# Altium PCB DAQ_Doc.PcbDoc (part 1 of 2)
Units mm, origin at the board's own origin, x right, y up, seen from the top; angles counter-clockwise.
Board outline 100.4 x 106.42 mm, 4 copper layers (Top Layer, Int1 (GND), Int2 (GND), Bottom Layer), stack 1.57 mm thick; 103 components, 79 nets, 453 pads, 246 vias.
Unrouted connection lines stored in the file: 5.
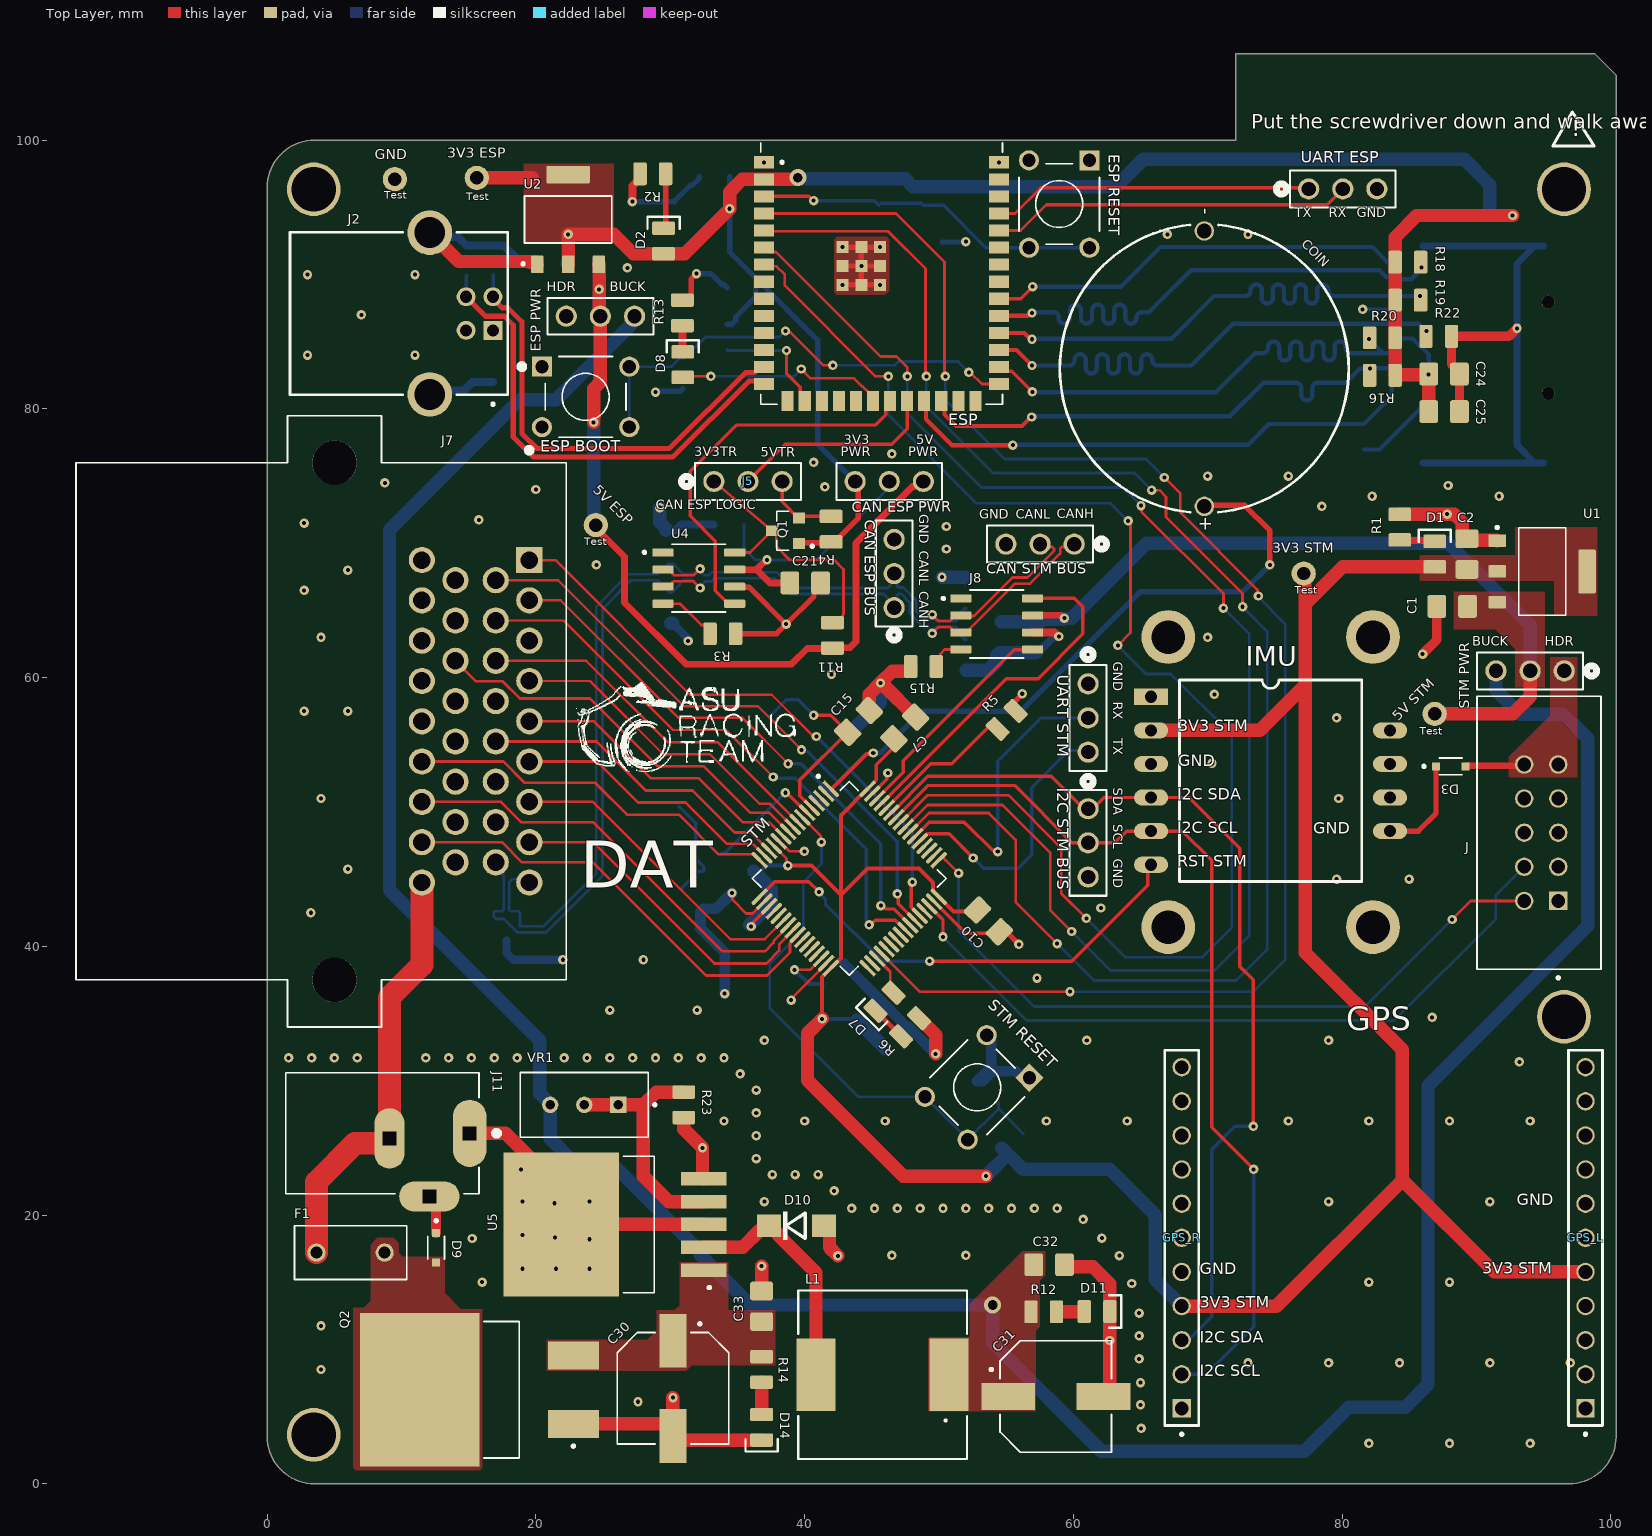
[diagram p0: Top Layer view]
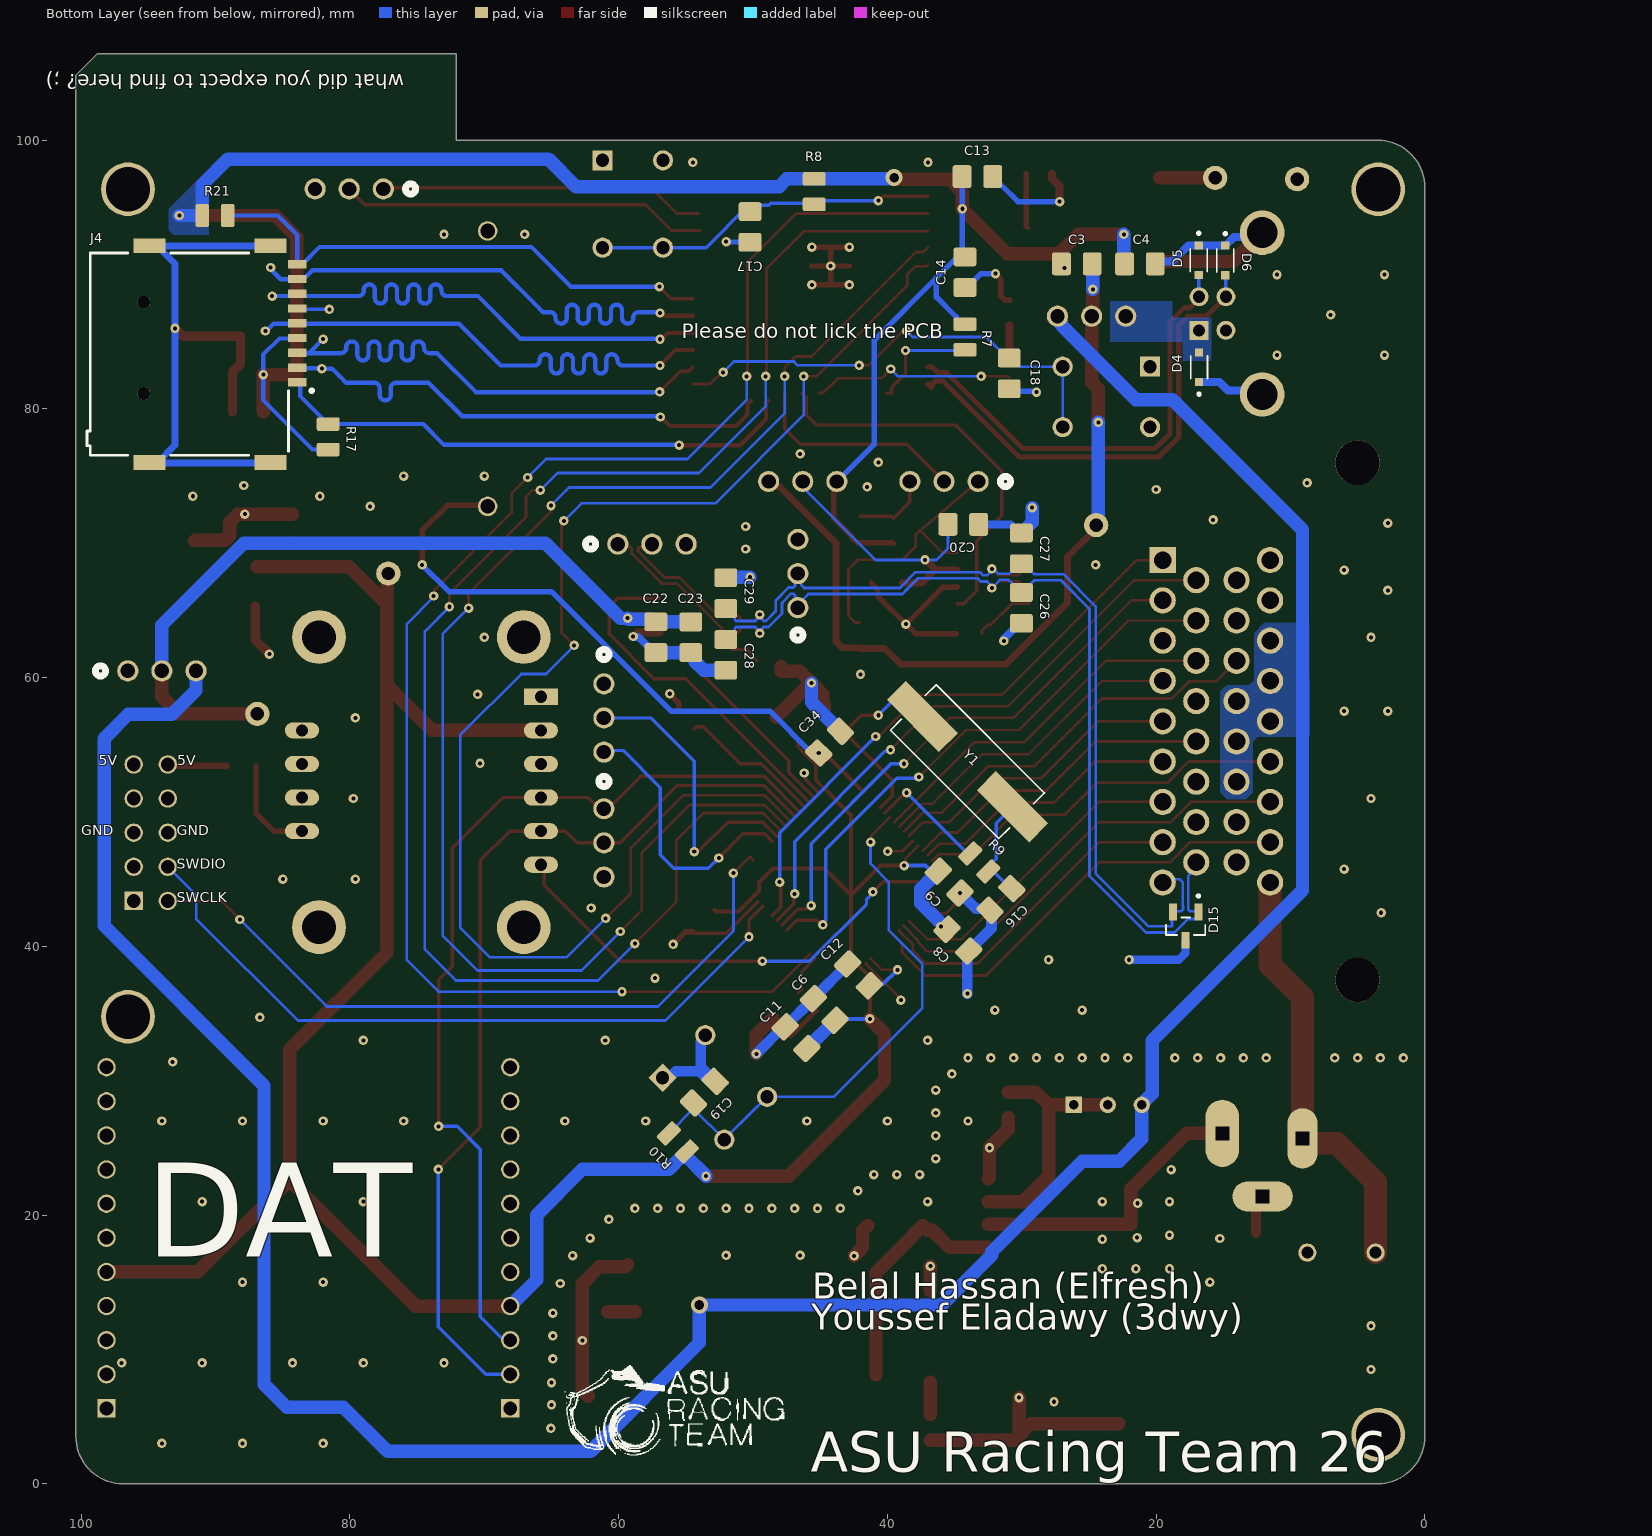
[diagram p1: Bottom Layer view, seen from below]
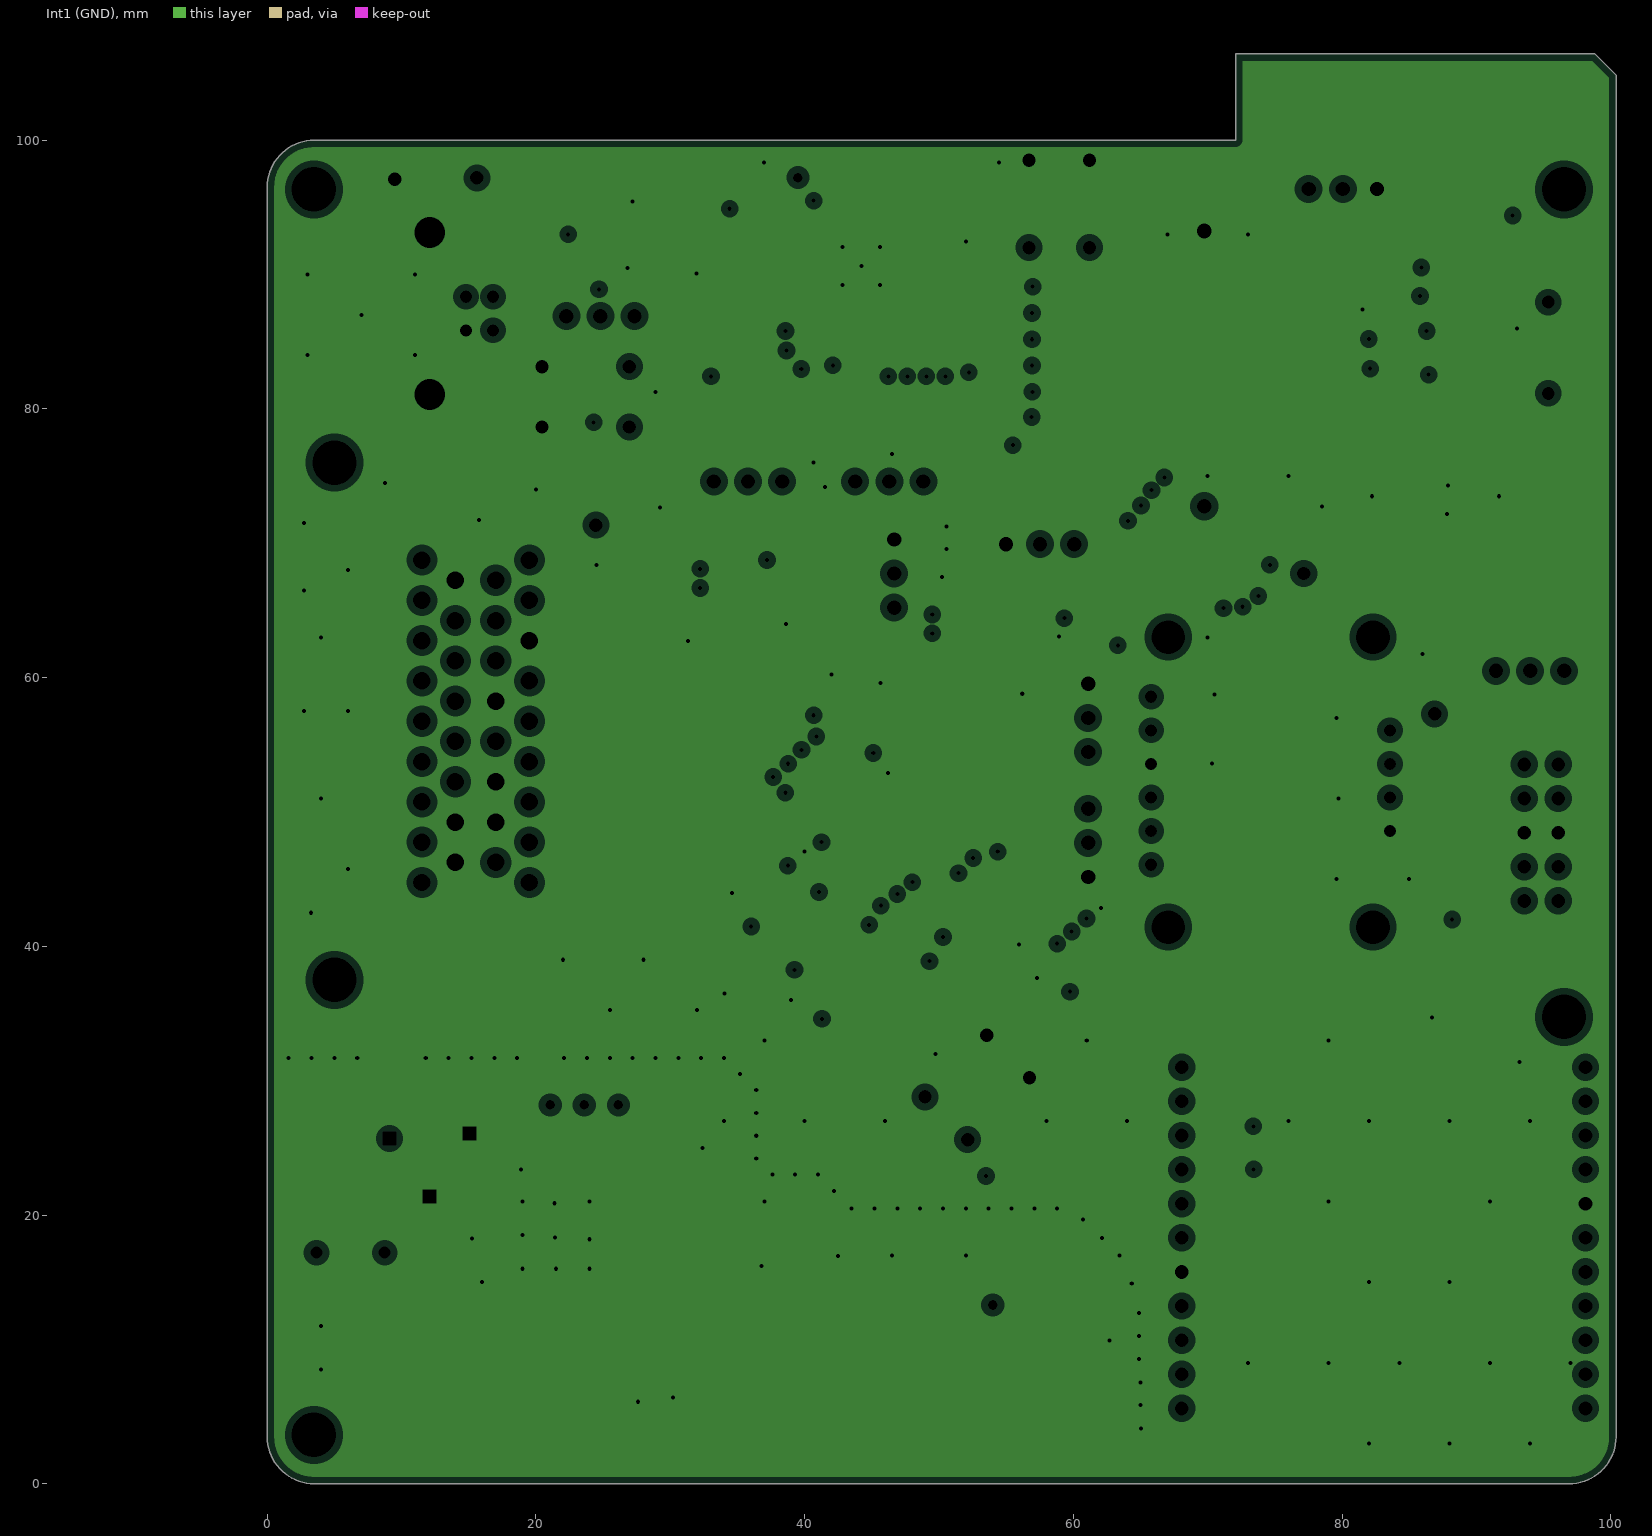
[diagram p2: Int1 (GND), clearances drawn from the general rule]
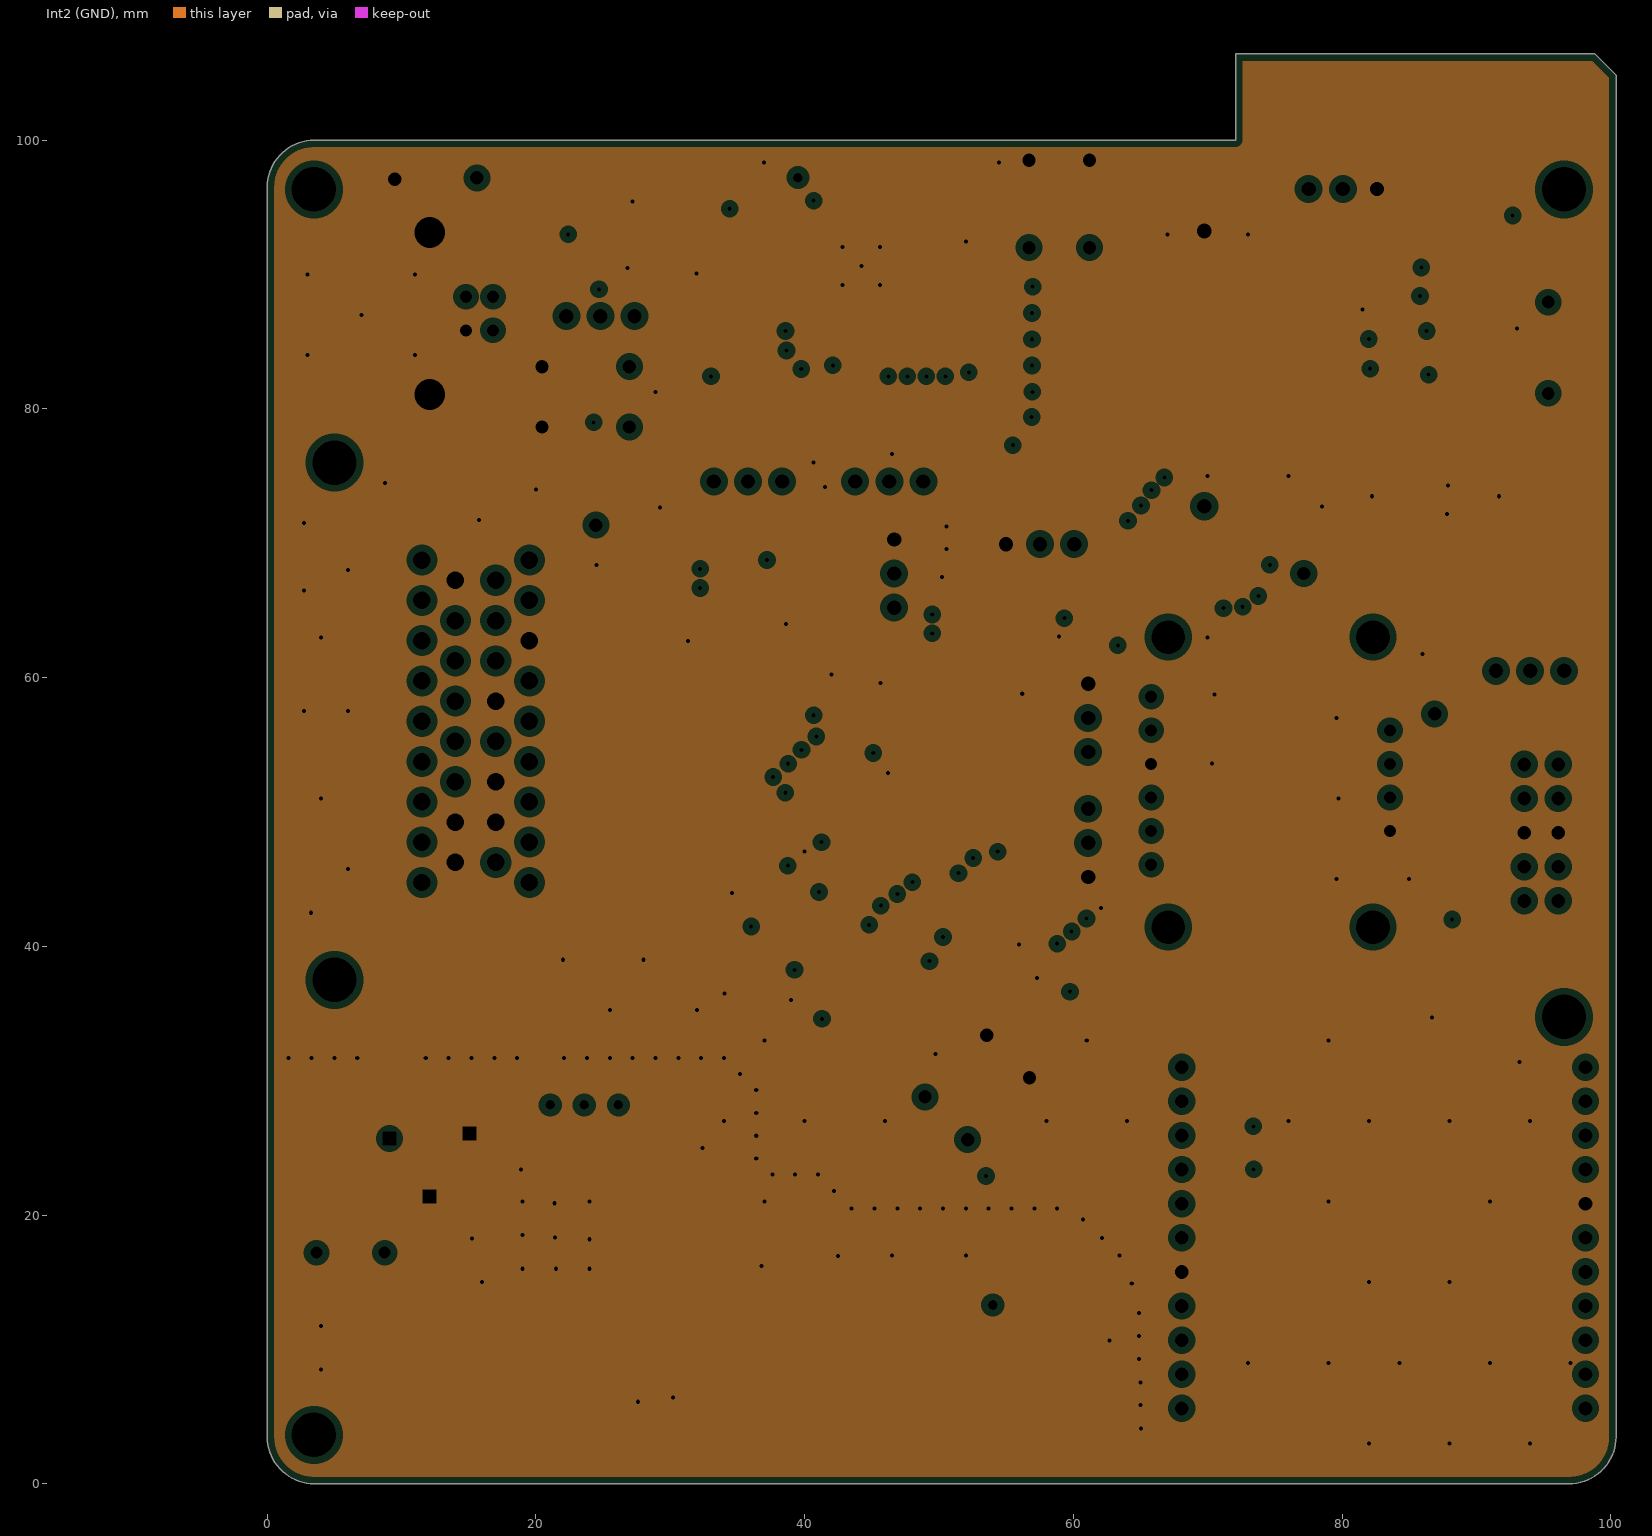
[diagram p3: Int2 (GND), clearances drawn from the general rule]
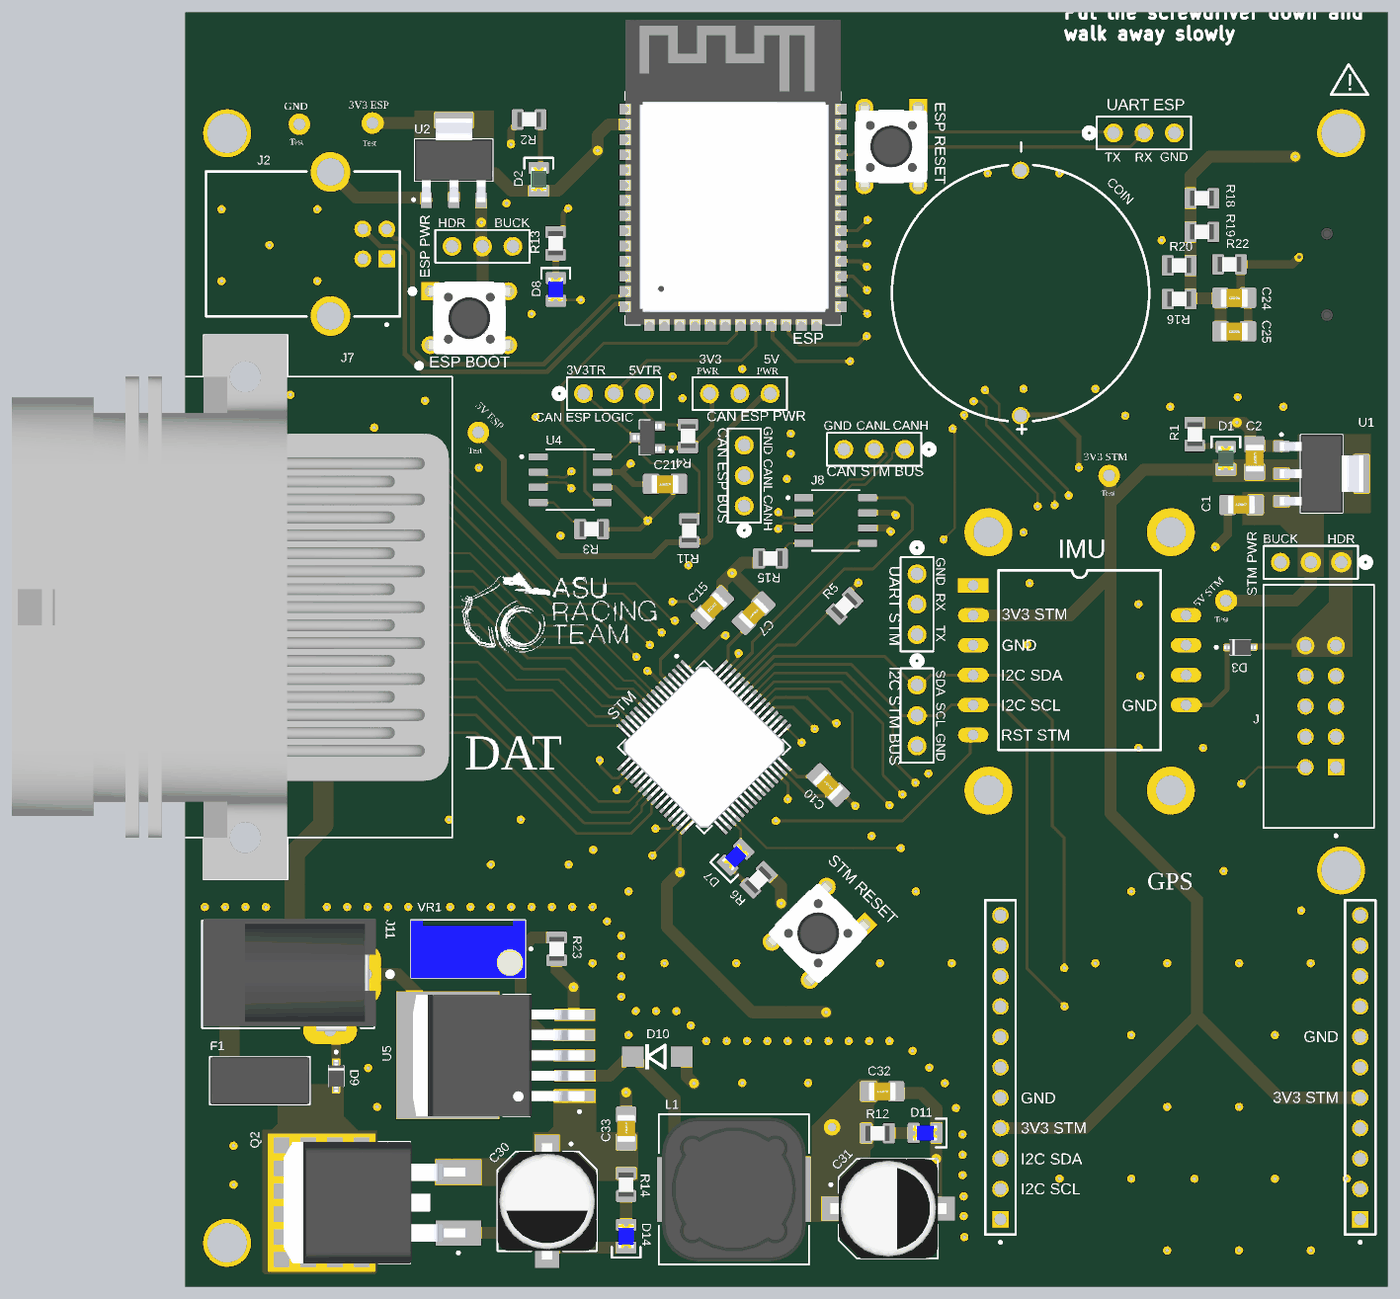
[diagram p5: 3D render of the assembled board from above, using the file's embedded part models]
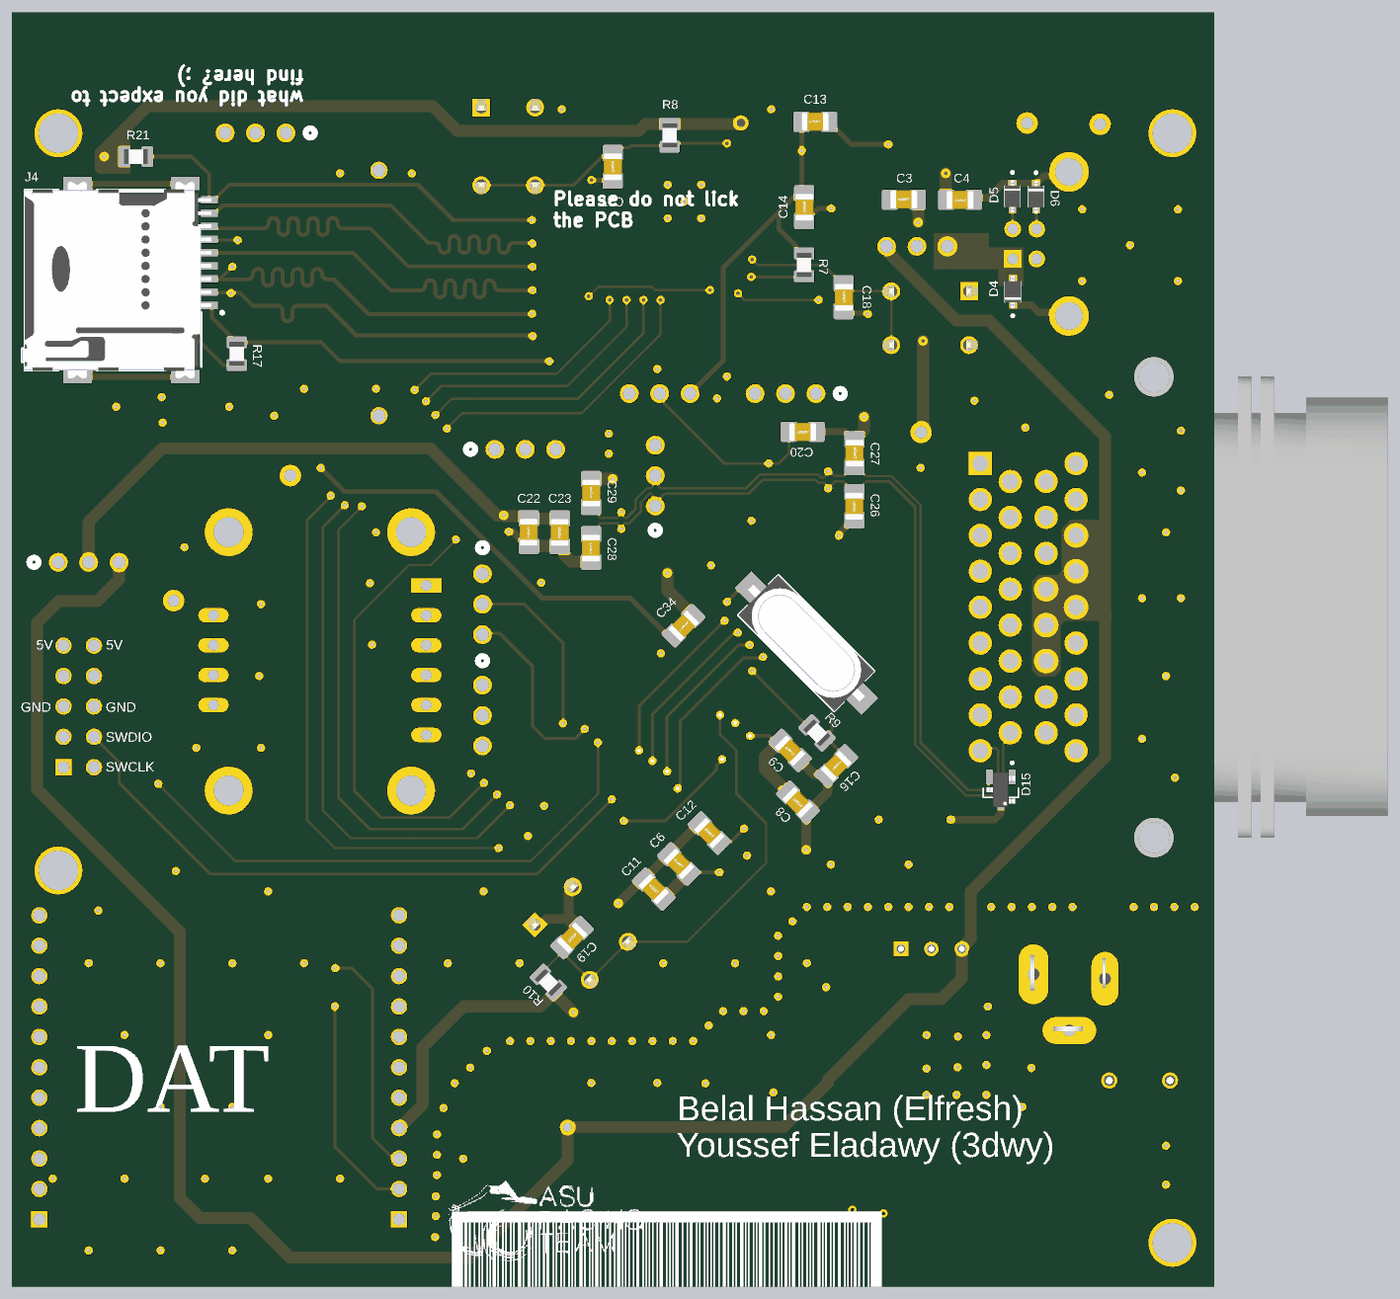
[diagram p6: 3D render of the assembled board from below, using the file's embedded part models]

## Layer stack, top to bottom
Top Solder: solder mask 0.0254, SM-001, Dk 4
Top Layer: signal copper 0.035
Dielectric 2: prepreg 0.2, PP-017, Dk 4.6
Int1 (GND): plane copper 0.0175, net GND
Dielectric 3: core 1.065, Core-039, Dk 4.8
Int2 (GND): plane copper 0.0175, net GND
Dielectric 4: prepreg 0.2, PP-017, Dk 4.6
Bottom Layer: signal copper 0.035
Bottom Solder: solder mask 0.0254, SM-001, Dk 4

## Board outline
0,3.5 0,96.5 cw(c3.5,96.5) 3.5,100 72.075,100 72.075,106.425 98.825,106.425 100.4,104.85 100.4,96.5 100.4,3.5 cw(c96.9,3.5) 96.9,0 3.5,0 cw(c3.5,3.5)

## Design rules (kind name [scope] priority, off if disabled: settings)
BoardOutlineClearance [All] p1: gap=0.3 ignorepadtopadclearanceinfootprint=FALSE except(0.4: Arc-SplitBarrior Arc-SplitContinuation Track-SplitBarrior Track-SplitContinuation SMDPad-SplitBarrior SMDPad-SplitContinuation THPad-SplitBarrior THPad-SplitContinuation Via-SplitBarrior Via-SplitContinuation Fill-SplitBarrior Fill-SplitContinuation Poly-SplitBarrior Poly-SplitContinuation Region-SplitBarrior Region-SplitContinuation Text-SplitBarrior Text-SplitContinuation)
Clearance "Clearance Same Nets" [All] p1: gap=0 ignorepadtopadclearanceinfootprint=FALSE
Clearance [All] p2: gap=0.152 ignorepadtopadclearanceinfootprint=TRUE
ComponentClearance [All] p1: gap=0 collisioncheckmode=3 verticalgap=0 showdistances=FALSE
DiffPairsRouting DiffPairsRouting_1 [All] p1: maxlimit=0.254 minlimit=0.254 mostfreqgap=0.254 toplayer_minwidth=0.381 toplayer_maxwidth=0.381 toplayer_prefwidth=0.381 bottomlayer_minwidth=0.381 bottomlayer_maxwidth=0.381 bottomlayer_prefwidth=0.381 maxuncoupledlength=12.7
DiffPairsRouting ESP_USB_Impedance [InDifferentialPair('ESP_USB_D')] p2: maxlimit=0.3 minlimit=0.3 mostfreqgap=0.3 toplayer_minwidth=0.3 toplayer_maxwidth=0.3 toplayer_prefwidth=0.3 bottomlayer_minwidth=0.3 bottomlayer_maxwidth=0.3 bottomlayer_prefwidth=0.3 impedanceprofiledriven=TRUE impedanceprofileid={AE35CDEA-F245-4979-9637-B15F08414B0D} impedanceprofilevalue=90.000000 maxuncoupledlength=12.7
Height [All] p1: minheight=0 maxheight=100 prefheight=12.7
HoleSize [All] p1: absolutevalues=TRUE maxlimit=6.3 minlimit=0.2 maxpercent=80.000 minpercent=20.000
MatchedLengths MatchLengths_xS_SDIO [InxSignalClass('xS_SDIO_Class')] p1: tolerance=1.2 checknetsindiffpair=FALSE checkdiffpairvsdiffpair=TRUE checkxsignals=TRUE checkothers=TRUE
MinimumAnnularRing [All] p1: minimumring=0.13
MinimumSolderMaskSliver [All] p1: minsoldermaskwidth=0.1
PlaneClearance [All] p1: clearance=0.508
PlaneConnect [All] p1: planeconnectstyle=Direct reliefexpansion=0.508 reliefentries=4 reliefconductorwidth=0.254 reliefairgap=0.254
PolygonConnect PolygonConnect_1 [All] p1: connectstyle=Direct reliefconductorwidth=0.508 reliefentries=4 polygonreliefangle="90 Angle" airgapwidth=0.254
PolygonConnect [All] p2: connectstyle=Direct reliefconductorwidth=0.254 reliefentries=4 polygonreliefangle="90 Angle" airgapwidth=0.254
RoutingVias [All] p1: holewidth=0.5 width=1 viastyle="Through Hole" minholewidth=0.2 minwidth=0.35 maxholewidth=1 maxwidth=2
SilkToSilkClearance [All] p1: silktosilkclearance=0.1
SilkToSolderMaskClearance [IsPad] p1: minsilkscreentomaskgap=0.1 clearancetoexposedcopper=TRUE
SolderMaskExpansion [All] p1: expansion=0.05 istentingtop=FALSE
SupplyNets "Schematic Supply Nets_13" [InNet('CAN_ESP_Vin')] p1: voltage=0.000
SupplyNets "Schematic Supply Nets_12" [InNet('GND')] p2: voltage=0.000
SupplyNets "Schematic Supply Nets_11" [InNet('DC_Fuse_+12V')] p3: voltage=0.000
SupplyNets "Schematic Supply Nets_10" [InNet('+5V_Induc')] p4: voltage=0.000
SupplyNets "Schematic Supply Nets_9" [InNet('+5V_STMF4')] p5: voltage=0.000
SupplyNets "Schematic Supply Nets_8" [InNet('+5V_STMF4_HDR')] p6: voltage=0.000
SupplyNets "Schematic Supply Nets_6" [InNet('DC_IN_+12V')] p7: voltage=0.000
SupplyNets "Schematic Supply Nets_5" [InNet('+5V_ESP')] p8: voltage=0.000
SupplyNets "Schematic Supply Nets_4" [InNet('+5V_ESP_HDR')] p9: voltage=0.000
SupplyNets "Schematic Supply Nets_3" [InNet('+3V3_ESP')] p10: voltage=0.000
SupplyNets "Schematic Supply Nets_2" [InNet('+5V_Buck')] p11: voltage=0.000
SupplyNets "Schematic Supply Nets_1" [InNet('+3V3_STM32F4')] p12: voltage=0.000
SupplyNets "Schematic Supply Nets" [InNet('+12V')] p13: voltage=0.000
Width Width_1 [All] p1: maxlimit=100 minlimit=0.1 preferedwidth=0.2 minimp=50.000000 maximp=50.000000 favimp=50.000000
Width STMF4_SWD [InNetClass('JTAG')] p2: maxlimit=0.318 minlimit=0.318 preferedwidth=0.318 impedanceprofiledriven=TRUE impedanceprofileid={C978D3B7-4BA8-4DEE-A065-BD367ADA8D77} impedanceprofilevalue=50.000000 minimp=50.000000 maximp=50.000000 favimp=50.000000
Width SD-CARD_SDIO_Width [InNetClass('SDIO')] p3: maxlimit=0.318 minlimit=0.318 preferedwidth=0.318 impedanceprofiledriven=TRUE impedanceprofileid={C978D3B7-4BA8-4DEE-A065-BD367ADA8D77} impedanceprofilevalue=50.000000 minimp=50.000000 maximp=50.000000 favimp=50.000000
21 further rules are at their usual default settings.

## Classes and differential pairs
net class ESP_USB_Diff_Pair: ESP_USB_D_N ESP_USB_D_P
differential pair ESP_USB_D: +ESP_USB_D_P -ESP_USB_D_N
differential pair CAN: +CAN_P -CAN_N

## Components (designator, comment, footprint, x,y, rotation, side; value= is the part's Value field where it differs from the comment)
C1 "22uF" CAP_0805 88.2,65.3 r0 top
C2 "22uF" CAP_0805 89.3,69.2 r270 top
C3 "22uF" CAP_0805 25.9,90.8 r180 bottom
C4 "22uF" CAP_0805 21.2,90.8 r0 bottom
C6 "100nF" CAP_0805 44.7,35.3 r225 bottom
C7 "100nF" CAP_0805 47.452,56.252 r225 top
C8 "100nF" CAP_0805 34.75,40.46 r45 bottom
C9 "100nF" CAP_0805 35.4,44.78 r45 bottom
C10 "100nF" CAP_0805 53.683,41.892 r135 top
C11 "2.2uF" CAP_0805 46.8,33.2 r225 bottom
C12 "2.2uF" CAP_0805 42.15,37.875 r225 bottom
C13 "2.2uF" CAP_0805 33.3,97.3 r180 bottom
C14 "100nF" CAP_0805 34.225,90.175 r270 bottom
C15 "100nF" CAP_0805 44.01,56.74 r45 top
C16 "100nF" CAP_0805 31.55,43.49 r315 bottom
C17 "100nF" CAP_0805 50.225,93.55 r270 bottom
C18 "100nF" CAP_0805 30.925,82.643 r270 bottom
C19 "100nF" CAP_0805 53.623,29.147 r315 bottom
C20 "100nF" CAP_0805 34.35,71.41 r0 bottom
C21 "2.2uF" CAP_0805 40.043,67.05 r180 top
C22 "100nF" CAP_0805 57.225,63.013 r90 bottom
C23 "2.2uF" CAP_0805 54.635,63.003 r90 bottom
C24 "100nF" CAP_0805 87.6,82.6 r180 top
C25 "2.2uF" CAP_0805 87.6,79.8 r180 top
C26 "20pF" CAP_0805 30.025,65.187 r90 bottom
C27 "20pF" CAP_0805 30.025,69.623 r270 bottom
C28 "20pF" CAP_0805 52.025,61.693 r90 bottom
C29 "20pF" CAP_0805 52.025,66.293 r270 bottom
C30 "270uF 35V" CAP_EEEFT1E471AP 30.2,7.1 r270 top
C31 "470uF 25V" CAP_EEEFT1E471AP 58.7,6.5 r0 top
C32 "100nF" CAP_0805 58.2,16.3 r180 top
C33 "100nF" CAP_0805 36.8,13.2 r270 top
C34 "100nF" CAP_0805 44.3,55.2 r315 bottom
"CAN ESP BUS" "CAN(ESP)_Header" CONN_SD-42375-001_M320_03_MOL 46.665,65.205 r270 top
"CAN ESP PWR" "22284034" CONN_SD-42375-001_M320_03_MOL 48.84,74.6 r0 top
"CAN STM BUS" "CAN(STMF4)_Header" CONN_SD-42375-001_M320_03_MOL 60.065,69.94 r0 top
COIN "CR-2032" PANA-CR-2032HFN 69.75,83 r90 top
D1 "GREEN" LED_0805_GREEN 86.9,69.2 r270 top
D2 "GREEN" LED_0805_GREEN 29.5,92.5 r270 top
D3 "5V-TVS" DIO_PESD1LIN 88.1,53.4 r0 top
D4 "5V-TVS" DIO_PESD1LIN 16.8,83.1 r90 bottom
D5 "5V-TVS" DIO_PESD1LIN 16.825,91.075 r270 bottom
D6 "5V-TVS" DIO_PESD1LIN 14.85,91.05 r270 bottom
D7 "BLUE" LED_0805_BLUE 45.95,35.875 r45 top
D8 "BLUE" LED_0805_BLUE 30.925,83.3 r270 top
D9 "5V-TVS" DIO_PESD1LIN 12.575,17.575 r270 top
D10 "SS34-A" DO-214AC 39.4,19.2 r0 top
D11 "BLUE" LED_0805_BLUE 61.77,12.82 r180 top
D14 "BLUE" LED_0805_BLUE 36.8,4.2 r90 top
D15 "ESD2CAN24DBZRQ1" SOT95P237X112-3N 17.8,41.5 r270 bottom
ESP "ESP32-S3-WROOM-1-N8R2" ESP32-S3-WROOM-1_NO-KEEPOUT 45.725,93.1 r0 top
"ESP BOOT" "BOOT_ESP" SW_FSM8JH 23.7,80.9 r0 top
"ESP PWR" "22284034" CONN_SD-42375-001_M320_03_MOL 22.26,86.9 r180 top
"ESP RESET" "Reset_ESP" SW_FSM8JH 58.95,95.25 r270 top
F1 "0697H0315-01" FUSRR508W60L835T400H810 6.2,17.2 r0 top
GPS_L "Header 11-pin" SAMTEC_MTSW-111-22-T-S-440 98.123,18.304 r270 top
GPS_R "Header 11-pin" SAMTEC_MTSW-111-22-T-S-440 68.068,18.304 r270 top
"I2C STM BUS" "I2C_Header" CONN_SD-42375-001_M320_03_MOL 61.1,50.24 r90 top
IMU "BNO055" IMU 65.795,58.575 r0 top
J "1761681-3" TE_1761681-3 96.1,43.38 r90 top
J2 "USB-B-S-X-X-TH" SAMTEC_USB-B-S-X-X-TH 12.1,87.1 r270 top
J4 "SD-Card" GCT_MEM2075-00-140-01-A 95.345,84.555 r270 bottom
J5 "22284034" CONN_SD-42375-001_M320_03_MOL 33.245,74.6 r180 top
J7 "6437288-1" TE_6437288-1 15.51,56.751 r270 top
J8 "MCP2551-I/SN" SOIC127P599X175-8N 54.3,63.993 r180 top
J11 "PJ-002B" CUI_PJ-002B 15.069,26.081 r180 top
L1 "47uF" IND_CDRH127/LDNP-470MC_SUM 45.8,8.1 r180 top
Q1 "2N7002" TRANS_2N7002 38.57,70.93 r180 top
Q2 "IRF4905STRRPBF" TRANS_IRF4905STRRPBF 15.8,7 r180 top
R1 "1k" RES_0805 84.3,71.2 r270 top
R2 "1k" RES_0805 28.7,97.5 r180 top
R3 "10k" RES_0805 33.91,63.27 r0 top
R4 "10k" RES_0805 41.97,71.05 r270 top
R5 "0R" RES_0805 55.041,56.851 r225 top
R6 "1k" RES_0805 47.85,33.975 r225 top
R7 "10k" RES_0805 34.225,85.35 r270 bottom
R8 "10k" RES_0805 45.45,96.175 r90 bottom
R9 "1k" RES_0805 33.16,46.25 r225 bottom
R10 "10k" RES_0805 55.6,25.4 r225 bottom
R11 "10k" RES_0805 42.075,63.15 r270 top
R12 "1.5k" RES_0805 57.8,12.8 r180 top
R13 "1k" RES_0805 30.9,87.15 r90 top
R14 "5k" RES_0805 36.8,8.5 r90 top
R15 "10k" RES_0805 48.85,60.825 r180 top
R16 "10k" RES_0805 83,82.5 r0 top
R17 "10k" RES_0805 81.625,77.925 r270 bottom
R18 "10k" RES_0805 84.9,90.925 r180 top
R19 "10k" RES_0805 84.9,88.1 r180 top
R20 "10k" RES_0805 83,85.3 r0 top
R21 "10k" RES_0805 90.05,94.4 r0 bottom
R22 "10k" RES_0805 87.2,85.4 r180 top
R23 "330R" RES_0805 31,28.2 r90 top
STM "STM32F446RET6" QFP50P1200X1200X160-64N 43.32,45.051 r315 top
"STM PWR" "22284034" CONN_SD-42375-001_M320_03_MOL 96.54,60.5 r0 top
"STM RESET" "Reset_STM32" SW_FSM8JH 52.846,29.501 r225 top
U1 "AMS1117-3.3" SOT229P700X180-4N 94.9,67.9 r0 top
U2 "AMS1117-3.3" SOT229P700X180-4N 22.4,94.1 r90 top
U4 "SN65HVD230D" SOIC127P599X175-8N 32.125,67.405 r180 top
U5 "LM2596SX-ADJ/NOPB" VREG_LM2596SX-ADJ/NOPB 21.9,19.3 r180 top
"UART ESP" "UART(ESP)_Header" CONN_SD-42375-001_M320_03_MOL 77.52,96.375 r180 top
"UART STM" "UART(STMF4)_Header" CONN_SD-42375-001_M320_03_MOL 61.1,54.46 r270 top
VR1 "0 - 10K" TRIM_3296W-1-103LF 23.6,28.2 r180 top
Y1 "8MHz" XTAL_ECS-80-20-5PVX 34.039,53.749 r45 bottom

## Footprints (in the part's own frame and the unit in brackets; to place one, negate y for a bottom-side part, rotate by r counter-clockwise, add the part's x,y. Pads: shape width x height; smd on the part's side, far side on the other; paste and mask are expansions set on the pad)
CAP_0805 [mm]
  rrect25% 1.4x1.7 smd: 1(-1.143,0) 2(1.143,0)
  body extent -1.15,-0.76 1.15,0.79, height 1.01
CAP_EEEFT1E471AP [mm]
  rect 4x2 smd: 1(-3.55,0) 2(3.55,0)
  silkscreen extent -4.9,-4.15 4.15,4.15, body extent -4.85,-4.15 4.85,4.15, height 10.2
CONN_SD-42375-001_M320_03_MOL [mil]
  round 62 hole 42: 1(0,0) 2(-100,0) 3(-200,0)
  silkscreen extent -255,-54 95,54
CUI_PJ-002B [mm]
  oval 2.5x5 hole 1 square: 1(0,0)
  oval 2.25x4.5 hole 1 square: 2(5.969,0.381)
  oval 4.5x2.25 hole 1 square: 3(3,4.7)
  silkscreen extent -2.2,-4.5 13.7,4.5, body extent -0.81,-4.63 13.59,4.77, height 11
DIO_PESD1LIN [mm]
  rect 0.6x0.6 smd paste-0.05: 1(-1.1,0) 2(1.1,0)
  silkscreen extent -2.1,-0.63 0.85,0.63, body extent -1.34,-0.65 1.34,0.65, height 1.15
DO-214AC [mm]
  rect 1.8x1.7 smd: A(2.05,0) C(-2.05,0)
  silkscreen extent -1,-1.05 0.65,1.05
ESP32-S3-WROOM-1_NO-KEEPOUT [mm]
  rect 1.5x0.9 smd: 1(-8.75,5.26) 2(-8.75,3.99) 3(-8.75,2.72) 4(-8.75,1.45) 5(-8.75,0.18) 6(-8.75,-1.09) 7(-8.75,-2.36) 8(-8.75,-3.63) 9(-8.75,-4.9) 10(-8.75,-6.17) 11(-8.75,-7.44) 12(-8.75,-8.71) 13(-8.75,-9.98) 14(-8.75,-11.25) 27(8.75,-11.25) 28(8.75,-9.98) 29(8.75,-8.71) 30(8.75,-7.44) 31(8.75,-6.17) 32(8.75,-4.9) 33(8.75,-3.63) 34(8.75,-2.36) 35(8.75,-1.09) 36(8.75,0.18) 37(8.75,1.45) 38(8.75,2.72) 39(8.75,3.99) 40(8.75,5.26)
  rect 0.9x1.5 smd: 15(-6.985,-12.5) 16(-5.715,-12.5) 17(-4.445,-12.5) 18(-3.175,-12.5) 19(-1.905,-12.5) 20(-0.635,-12.5) 21(0.635,-12.5) 22(1.905,-12.5) 23(3.175,-12.5) 24(4.445,-12.5) 25(5.715,-12.5) 26(6.985,-12.5)
  rect 0.9x0.9 smd: 41_1(-1.5,-2.46) 41_2(-2.9,-2.46) 41_3(-0.1,-2.46) 41_4(-2.9,-3.86) 41_5(-1.5,-3.86) 41_6(-0.1,-3.86) 41_7(-2.9,-1.06) 41_8(-1.5,-1.06) 41_9(-0.1,-1.06)
  silkscreen extent -9,-12.75 9,6.7, body extent -9,-12.75 9,12.75, height 3.25
FUSRR508W60L835T400H810 [mm]
  round 1.35 hole 0.9: 1(-2.54,0) 2(2.54,0)
  silkscreen extent -4.18,-2 4.18,2, body extent -4.18,-2 4.18,2, height 8.1
GCT_MEM2075-00-140-01-A [mm]
  rect 0.62x1.4 smd: P1(2.58,11.42) P2(1.48,11.42) P3(0.38,11.42) P4(-0.72,11.42) P5(-1.82,11.42) P6(-2.92,11.42) P7(-4.02,11.42) P8(-5.12,11.42) P9(-6.22,11.42)
  rect 1.1x2.4 smd: SH1(-7.6,0.42) SH2(-7.6,9.42) SH3(8.55,9.42) SH4(8.55,0.42)
  round 0.95 hole 0.95 unplated: ""(-3.4,0) ""(3.4,0)
  silkscreen extent -7.05,-4.23 8,12.62, body extent -7.74,-4.25 8.7,11.6, height 1.45
IMU [mm]
  rect 2.54x1.2 hole 0.9: 1(0,0)
  oval 2.54x1.2 hole 0.9: 2(0,-2.5) 3(0,-5) 4(0,-7.5) 5(0,-10) 6(0,-12.5) 7(17.78,-10) 8(17.78,-7.5) 9(17.78,-5) 10(17.78,-2.5)
  round 4 hole 2.5: 11(1.27,4.445) 12(16.51,4.445) 13(1.27,-17.145) 14(16.51,-17.145)
  silkscreen extent 2.1,-13.75 15.68,1.25
IND_CDRH127/LDNP-470MC_SUM [mil]
  rect 114x213 smd: 1(-195,0) 2(195,0)
  silkscreen extent -247,-247 247,247, body extent -236,-236 236,236, height 315
LED_0805_BLUE [mm]
  rrect25% 1x1.7 smd: A(0.95,0) K(-0.95,0)
  silkscreen extent -1.8,-1.2 -0.9,1.2, body extent -1,-0.62 1,0.63, height 1.12
LED_0805_GREEN [mm]
  rrect25% 1x1.7 smd: A(0.95,0) K(-0.95,0)
  silkscreen extent -1.8,-1.2 -0.9,1.2, body extent -1,-0.63 1,0.63, height 1.12
PANA-CR-2032HFN [mm] "TH, 2-Leads, Dia 21.5mm"
  round 1.45 hole 1.1: 1(-10.25,0) 2(10.25,0)
  silkscreen extent -10.7,-10.75 10.7,10.75, body extent -10.75,-10.75 10.75,10.75, height 9.9
QFP50P1200X1200X160-64N [mm]
  rrect50% 1.56x0.28 smd: 1(-5.68,3.75) 2(-5.68,3.25) 3(-5.68,2.75) 4(-5.68,2.25) 5(-5.68,1.75) 6(-5.68,1.25) 7(-5.68,0.75) 8(-5.68,0.25) 9(-5.68,-0.25) 10(-5.68,-0.75) 11(-5.68,-1.25) 12(-5.68,-1.75) 13(-5.68,-2.25) 14(-5.68,-2.75) 15(-5.68,-3.25) 16(-5.68,-3.75) 33(5.68,-3.75) 34(5.68,-3.25) 35(5.68,-2.75) 36(5.68,-2.25) 37(5.68,-1.75) 38(5.68,-1.25) 39(5.68,-0.75) 40(5.68,-0.25) 41(5.68,0.25) 42(5.68,0.75) 43(5.68,1.25) 44(5.68,1.75) 45(5.68,2.25) 46(5.68,2.75) 47(5.68,3.25) 48(5.68,3.75)
  rrect50% 0.28x1.56 smd: 17(-3.75,-5.68) 18(-3.25,-5.68) 19(-2.75,-5.68) 20(-2.25,-5.68) 21(-1.75,-5.68) 22(-1.25,-5.68) 23(-0.75,-5.68) 24(-0.25,-5.68) 25(0.25,-5.68) 26(0.75,-5.68) 27(1.25,-5.68) 28(1.75,-5.68) 29(2.25,-5.68) 30(2.75,-5.68) 31(3.25,-5.68) 32(3.75,-5.68) 49(3.75,5.68) 50(3.25,5.68) 51(2.75,5.68) 52(2.25,5.68) 53(1.75,5.68) 54(1.25,5.68) 55(0.75,5.68) 56(0.25,5.68) 57(-0.25,5.68) 58(-0.75,5.68) 59(-1.25,5.68) 60(-1.75,5.68) 61(-2.25,5.68) 62(-2.75,5.68) 63(-3.25,5.68) 64(-3.75,5.68)
  silkscreen extent -7.1,-5.1 5.1,5.1, body extent -6,-6 6,6, height 1.59
RES_0805 [mm]
  rrect25% 1x1.7 smd: 1(-0.95,0) 2(0.95,0)
  body extent -1,-0.63 1,0.63, height 0.47
SAMTEC_MTSW-111-22-T-S-440 [mm]
  rect 1.37x1.37 / inner round 1.37 / far side rect 1.37x1.37 hole 1.02: 01(12.7,0)
  round 1.37 hole 1.02: 02(10.16,0) 03(7.62,0) 04(5.08,0) 05(2.54,0) 06(0,0) 07(-2.54,0) 08(-5.08,0) 09(-7.62,0) 10(-10.16,0) 11(-12.7,0)
  silkscreen extent -13.97,-1.27 14.72,1.27
SAMTEC_USB-B-S-X-X-TH [mm]
  rect 1.408x1.408 / inner round 1.408 / far side rect 1.408x1.408 hole 0.9: 1(1.25,4.7)
  round 1.408 hole 0.9: 2(-1.25,4.7) 3(-1.25,2.7) 4(1.25,2.7)
  round 3.316 hole 2.3: S1(-6.02,0) S2(6.02,0)
  silkscreen extent -6.05,-10.4 6.85,5.8
SOIC127P599X175-8N [mm]
  rrect25% 1.58x0.6 smd: 1(-2.67,1.905) 2(-2.67,0.635) 3(-2.67,-0.635) 4(-2.67,-1.905) 5(2.67,-1.905) 6(2.67,-0.635) 7(2.67,0.635) 8(2.67,1.905)
  silkscreen extent -2,-2.53 4.07,2.52
SOT95P237X112-3N [mm]
  rect 1.24x0.59 smd: 1(-1.055,0.95) 2(-1.055,-0.95) 3(1.055,0)
  silkscreen extent -2.35,-1.46 0.65,1.46, body extent -1.19,-1.46 1.18,1.46, height 1.12
SOT229P700X180-4N [mm]
  rrect15% 1.31x0.93 smd: 1(-3.345,2.29) 2(-3.345,0) 3(-3.345,-2.29)
  rrect15% 1.31x3.24 smd: 4(3.345,0)
  silkscreen extent -3.45,-3.25 1.75,3.37, body extent -3.5,-3.25 3.5,3.25, height 1.8
SW_FSM8JH [mm]
  rect 1.498x1.498 / inner round 1.498 / far side rect 1.498x1.498 hole 0.99: 1(-3.25,2.25)
  round 1.498 hole 0.99: 2(-3.25,-2.25) 3(3.25,2.25) 4(3.25,-2.25)
  silkscreen extent -4.95,-3 3,3, body extent -3.95,-3 3.95,3, height 9.5
TE_1761681-3 [mm]
  rect 1.37x1.37 hole 1.02: 1(0,0)
  round 1.37 hole 1.02: 2(0,2.54) 3(2.54,0) 4(2.54,2.54) 5(5.08,0) 6(5.08,2.54) 7(7.62,0) 8(7.62,2.54) 9(10.16,0) 10(10.16,2.54)
  silkscreen extent -5.83,-3.18 15.24,6.04
TE_6437288-1 [mm]
  rect 1.95x1.95 / inner round 1.95 / far side rect 1.95x1.95 hole 1.3: 1(-12,4)
  round 1.95 hole 1.3: 2(-9,4) 3(-6,4) 4(-3,4) 5(0,4) 6(3,4) 7(6,4) 8(9,4) 9(12,4) 10(-10.5,1.5) 11(-7.5,1.5) 12(-4.5,1.5) 13(-1.5,1.5) 14(1.5,1.5) 15(4.5,1.5) 16(7.5,1.5) 17(10.5,1.5) 18(-10.5,-1.5) 19(-7.5,-1.5) 20(-4.5,-1.5) 21(-1.5,-1.5) 22(1.5,-1.5) 23(4.5,-1.5) 24(7.5,-1.5) 25(10.5,-1.5) 26(-12,-4) 27(-9,-4) 28(-6,-4) 29(-3,-4) 30(0,-4) 31(3,-4) 32(6,-4) 33(9,-4) 34(12,-4)
  round 3.3 hole 3.3 unplated: ""(-19.25,-10.5) ""(19.25,-10.5)
  silkscreen extent -22.75,-29.75 22.75,6.75, body extent -22.75,-30.02 22.75,6.48, height 28.15
TRANS_2N7002 [mm]
  rect 0.9x0.8 smd: 1(-1,0.95) 2(-1,-0.95) 3(1,0)
  silkscreen extent -2.1,-1.45 0.65,1.45, body extent -1.2,-1.45 1.2,1.45, height 1.2
TRANS_IRF4905STRRPBF [mm]
  rect 3.81x2.08 smd: 1(-6.985,2.54) 3(-6.985,-2.54)
  rect 8.89x11.43 smd paste-7: 2(4.445,0)
  silkscreen extent -7.08,-5.08 -0.32,5.08, body extent -7.62,-5.08 7.62,5.08, height 4.83
TRIM_3296W-1-103LF [mm]
  rect 1.218x1.218 / inner round 1.218 / far side rect 1.218x1.218 hole 0.71: 1(-2.54,0)
  round 1.218 hole 0.71: 2(0,0) 3(2.54,0)
  silkscreen extent -5.35,-2.41 4.77,2.42, body extent -4.76,-2.41 4.77,2.42, height 11.55
VREG_LM2596SX-ADJ/NOPB [mm]
  rect 3.4x1 smd paste-0.05 mask+0.07: 1(-10.6,3.4) 2(-10.6,1.7) 3(-10.6,0) 4(-10.6,-1.7) 5(-10.6,-3.4)
  rect 8.6x10.7 smd paste-0.05 mask+0.07: 6(0,0)
  silkscreen extent -11.1,-5.08 -4.62,5.08, body extent -11.43,-5.08 2.92,5.08, height 4.65
XTAL_ECS-80-20-5PVX [mm]
  rect 5.5x2 smd: 1(-4.75,0) 2(4.75,0)
  silkscreen extent -5.7,-2.4 5.7,2.4, body extent -6.6,-2.35 6.6,2.35, height 2.6

## Part data
C1 C2 C3 C4 C6 C7 C8 C9 C10 C11 C12 C13 C14 C15 C16 C17 C18 C19 C20 C21 C22 C23 C24 C25 C26 C27 C28 C29 C32 C33 C34: library part CAP_0805, "Capacitor SMD 0805"
C30: library part EEEFT1E471AP, "35V ±20% 270uF SMD,D10xL10mm Hybrid Aluminum Electrolytic Capacitors ROHS", Package="RADIAL-2 Panasonic", Check_prices=https://www.snapeda.com/parts/EEEFT1E471AP/Panasonic/view-part/?ref=eda, MF=Panasonic, MP=EEEFT1E471AP, SnapEDA_Link=https://www.snapeda.com/parts/EEEFT1E471AP/Panasonic/view-part/?ref=snap
C31: library part EEEFT1E471AP, "Cap Aluminum Lytic 470uF 25V 20% (8 X 10.2mm) SMD 0.08 Ohm 850mA 2000h 105C Automotive T/R", Package="RADIAL-2 Panasonic", Check_prices=https://www.snapeda.com/parts/EEEFT1E471AP/Panasonic/view-part/?ref=eda, MF=Panasonic, MP=EEEFT1E471AP, SnapEDA_Link=https://www.snapeda.com/parts/EEEFT1E471AP/Panasonic/view-part/?ref=snap
"CAN ESP BUS" "CAN STM BUS" "I2C STM BUS" "UART ESP" "UART STM": library part 22284034, Package=None, Availability=Unavailable, MP=22284034, Price=None
"CAN ESP PWR" "ESP PWR" J5 J8 "STM PWR": Package=None, Availability=Unavailable, Price=None
  "CAN ESP PWR" "ESP PWR" J5 "STM PWR": MP=22284034
  J8: MP=MCP2551-I/SN
COIN: library part CMP-2000-05296-1, "Coin Cell Battery, 225 mAh, 0.2 mA, 3 V, -30 to 60 degC, Bulk", Battery Capacity=220mAh, Battery Voltage=3V, Manufacturer=Panasonic, Battery IEC Code=CR2032, Battery NEDA Code=5004LC, Battery Size Code=2032, Battery Technology=LithiumManganeseDioxide, Battery Terminals=PCBPins, Datasheet URL=https://datasheet.ciiva.com/3/aaa4000de87-3072.pdf, Datasheet Version="Rev. 0, 05/2010", External Depth=-, External Diameter=20mm, External Height=3.2mm, External Width=-, Manufacturer URL=http://www.panasonic.com/, Product Range=-, SVHC=1,2-dimethoxyethane,ethyleneglycoldimethylether(EGDME)(15-Jun-2015), Weight=2.9g
D1 D2: library part LED_0805_GREEN, "LED 0805 GREEN SMD"
D3 D4 D5 D6: library part PESD1LIN, "10A 8V Bidirectional 5V SOD-323 ESD and Surge Protection (TVS/ESD) ROHS", Package="SOD-323 Vishay Semiconductor Diodes Division", Check_prices=https://www.snapeda.com/parts/PESD1LIN/Nexperia/view-part/?ref=eda, MF="Nexperia USA", MP=PESD1LIN, SnapEDA_Link=https://www.snapeda.com/parts/PESD1LIN/Nexperia/view-part/?ref=snap
D7 D8 D11 D14: library part LED_0805_BLUE, "LED 0805 BLUE SMD"
D9: library part PESD1LIN, "44V, 70V Clamp 3A (8/20Âµs) Ipp Tvs Diode Surface Mount SOD-323", Package="SOD-323 Vishay Semiconductor Diodes Division", Check_prices=https://www.snapeda.com/parts/PESD1LIN/Nexperia/view-part/?ref=eda, MF="Nexperia USA", MP=PESD1LIN, SnapEDA_Link=https://www.snapeda.com/parts/PESD1LIN/Nexperia/view-part/?ref=snap
D10: "Schottky barrier diode, 3A, 40V", Package=None, Check_prices=https://www.snapeda.com/parts/SS34A/HY+Electronic/view-part/?ref=eda, MF="hy electronic corp", MP=SS34A, SnapEDA_Link=https://www.snapeda.com/parts/SS34A/HY+Electronic/view-part/?ref=snap
D15: "Automotive, dual, 3-pF, ±24-V, ±30-kV ESD protection diode for in-vehicle networks", Package="SOT-23 Texas Instruments", Check_prices=https://www.snapeda.com/parts/ESD2CAN24DBZRQ1/Texas+Instruments/view-part/?ref=eda, MF="Texas Instruments", MP=ESD2CAN24DBZRQ1, SnapEDA_Link=https://www.snapeda.com/parts/ESD2CAN24DBZRQ1/Texas+Instruments/view-part/?ref=snap
ESP: library part ESP32-S3-WROOM-1, "Multiprotocol Modules SMD Module, ESP32-S3R8, 3.3V, 8 MB Octal PSRAM Die, 16 MB Quad SPI Flash, PCB Antenna", MPN=ESP32-S3-WROOM-1-N16R2, Package="Module Espressif Systems", Check_prices=https://www.snapeda.com/parts/ESP32-WROOM-32/Espressif+Systems/view-part/?ref=eda, Digi-Key_Part_Number=1965-ESP32-S3-WROOM-1-N16R2TR-ND, MF="Espressif Systems", Price=3.98, SnapEDA_Link=https://www.snapeda.com/parts/ESP32-WROOM-32/Espressif+Systems/view-part/?ref=snap, Supplier=Digikey, Supplier Link=https://www.digikey.com/en/products/detail/espressif-systems/ESP32-S3-WROOM-1-N16R2/16162644
"ESP BOOT" "ESP RESET" "STM RESET": library part FSM8JH, "Tactile Switch SPST-NO Top Actuated Through Hole", Package=None, Availability="In Stock", Check_prices=https://www.snapeda.com/parts/FSM8JH/TE+Connectivity+ALCOSWITCH+Switches/view-part/?ref=eda, MF="TE Connectivity", MP=FSM8JH, Price=None, SnapEDA_Link=https://www.snapeda.com/parts/FSM8JH/TE+Connectivity+ALCOSWITCH+Switches/view-part/?ref=snap
F1: "2-Pin Radial Fuse", Package="Radial Box  Bel Fuse", Check_prices=https://www.snapeda.com/parts/0697H0315-01/Bel+Circuit+Protection/view-part/?ref=eda, MF="Bel Fuse", MP=0697H0315-01, SnapEDA_Link=https://www.snapeda.com/parts/0697H0315-01/Bel+Circuit+Protection/view-part/?ref=snap
GPS_L GPS_R: library part MTSW-111-22-T-S-440, Package=None, Availability=Unavailable, MP=MTSW-111-22-T-S-440, Price=None
IMU: library part Component_1
J: "Conn Shrouded Header HDR 10 POS 2.54mm Solder ST Thru-Hole Tray", Package=None, Availability=Unavailable, MF="TE Connectivity", MP=1761681-3, Price=None, SnapEDA_Link=https://www.snapeda.com/parts/1761681-3/TE%20Connectivity%20AMP%20Connectors/view-part/494554/?ref=snap
J2: "USB-B (USB TYPE-B) USB 2.0 Receptacle Connector 4 Position Through Hole, Right Angle", Package=None, Check_prices=https://www.snapeda.com/parts/USB-B-S-F-W-TH-TR/Samtec/view-part/?ref=eda, MF=Samtec, MP=USB-B-S-F-W-TH-TR, SnapEDA_Link=https://www.snapeda.com/parts/USB-B-S-F-W-TH-TR/Samtec/view-part/?ref=snap
J4: library part MEM2075-00-140-01-A, "9 (8 + 1) Position Card Connector microSD Surface Mount, Right Angle Gold", Package=None, Check_prices=https://www.snapeda.com/parts/MEM2075-00-140-01-A/Global+Connector+Technology/view-part/?ref=eda, MF="Global Connector Technology", MP=MEM2075-00-140-01-A, SnapEDA_Link=https://www.snapeda.com/parts/MEM2075-00-140-01-A/Global+Connector+Technology/view-part/?ref=snap
J7: "Receptacle Connector, Gold, Pitch 3.0000 mm, AC Voltage 250 V, AMP Series", Package=None, Check_prices=https://www.snapeda.com/parts/6437288-1/TE+Connectivity+AMP+Connectors/view-part/?ref=eda, EU_RoHS_Compliance=Compliant, MF="TE Connectivity", MP=6437288-1, SnapEDA_Link=https://www.snapeda.com/parts/6437288-1/TE+Connectivity+AMP+Connectors/view-part/?ref=snap
J11: "2.5 x 6.5 mm, 2.5 A, Horizontal, Through Hole, Dc Power Jack Connector", Package=None, Check_prices=https://www.snapeda.com/parts/PJ-002B/Same+Sky/view-part/?ref=eda, MF="Same Sky", MP=PJ-002B, SnapEDA_Link=https://www.snapeda.com/parts/PJ-002B/Same+Sky/view-part/?ref=snap
L1: library part CDRH127/LDNP-470MC, "Inductor Power Shielded Drum Core 47uH 20% 1KHz Ferrite 4.1A 0.078Ohm DCR T/R", Package="Non Standard Sumida", Check_prices=https://www.snapeda.com/parts/CDRH127/LDNP-470MC/Sumida/view-part/?ref=eda, MF="Sumida Corporation", MP=CDRH127/LDNP-470MC, SnapEDA_Link=https://www.snapeda.com/parts/CDRH127/LDNP-470MC/Sumida/view-part/?ref=snap
Q1: "MOSFET, SOT-23, N, 60V, 0.28A, 5â„", Package="SOT-23 Diotec", Check_prices=https://www.snapeda.com/parts/2N7002/Diotec/view-part/?ref=eda, MF="Diotec Semiconductor", MP=2N7002, SnapEDA_Link=https://www.snapeda.com/parts/2N7002/Diotec/view-part/?ref=snap
Q2: "RoHS Compliant", Package="D2PAK Infineon", Availability="In Stock", Check_prices=https://www.snapeda.com/parts/IRF4905STRRPBF/Infineon+Technologies/view-part/?ref=eda, MF="Infineon Technologies", MP=IRF4905STRRPBF, Price=None, Purchase-URL=https://pricing.snapeda.com/search/part/IRF4905STRRPBF/?ref=eda, SnapEDA_Link=https://www.snapeda.com/parts/IRF4905STRRPBF/Infineon+Technologies/view-part/?ref=snap
R1 R2 R3 R4 R5 R6 R7 R8 R9 R10 R11 R12 R13 R14 R15 R16 R17 R18 R19 R20 R21 R22 R23: library part RES_0805, "Resistor SMD 0805"
STM: "ARMÂ® CortexÂ®-M4 STM32F4 Microcontroller IC 32-Bit 180MHz 512KB _512K x 8_ FLASH 64-LQFP _10x10_", Package="LQFP-64 STMicroelectronics", Availability=Unavailable, MF=STMicroelectronics, MP=STM32F446RET6, Price=None, SnapEDA_Link=https://www.snapeda.com/parts/STM32F446RET6/STMicroelectronics/view-part/274209/?ref=snap
U1 U2: "Sot223/Pkg 1-Amp 3.3-Volt Low Drop Out Voltage Regulatator", Package="SOT-223 Seeed Technology", Check_prices=https://www.snapeda.com/parts/AMS1117-3.3/Advanced+Monolithic+Systems/view-part/?ref=eda, MF="Advanced Monolithic Systems", MP=AMS1117-3.3, SnapEDA_Link=https://www.snapeda.com/parts/AMS1117-3.3/Advanced+Monolithic+Systems/view-part/?ref=snap
U4: "3.3 V CAN Transceiver with Standby Mode", Package="SOIC-8 Texas Instruments", Check_prices=https://www.snapeda.com/parts/SN65HVD230D/Texas+Instruments/view-part/?ref=eda, MF="Texas Instruments", MP=SN65HVD230D, SnapEDA_Link=https://www.snapeda.com/parts/SN65HVD230D/Texas+Instruments/view-part/?ref=snap
U5: "Bá»™ Ä‘iá»u chá»‰nh háº¡ Ã¡p SIMPLE SWITCHERÂ® 4,5V Ä‘áº¿n 40V, 3A vá»›i sá»‘ lÆ°á»£ng thÃ nh pháº§n tháº¥p", Package="TO-263-5 Texas Instruments", Check_prices=https://www.snapeda.com/parts/LM2596SX-ADJ/NOPB/Texas+Instruments/view-part/?ref=eda, MF="Texas Instruments", MP=LM2596SX-ADJ/NOPB, SnapEDA_Link=https://www.snapeda.com/parts/LM2596SX-ADJ/NOPB/Texas+Instruments/view-part/?ref=snap
VR1: library part 3296W-1-103LF, "Trimmer, Cermet, Rest 10 Kilohms, PCB, 25 Turns, Pwr-Rtg 0.5W, 3296 Series", Package="NON STANDARD-3 Bourns", Check_prices=https://www.snapeda.com/parts/3296W-1-103LF/Bourns/view-part/?ref=eda, MF=Bourns, MP=3296W-1-103LF, SnapEDA_Link=https://www.snapeda.com/parts/3296W-1-103LF/Bourns/view-part/?ref=snap
Y1: library part ECS-80-20-5PVX, "SMD Quartz crystal", Package=None, Availability=Unavailable, MP=ECS-80-20-5PVX, Price=None

## Free pads (board coordinates)
  round 4 hole 3.3: 1(3.464,3.64) 2(3.464,96.35) 3(96.529,96.35) 4(96.529,34.756)
  round 1.8 hole 1: 5(86.9,57.3) 6(77.15,67.75) 7(24.456,71.356) 8(9.5,97.1) 9(15.6,97.2)

## Via types
v1: diameter 0.7, hole 0.3, Top Layer to Bottom Layer, 244 vias
v2: diameter 1.27, hole 0.711, Top Layer to Bottom Layer, 2 vias

## Nets (pads, with @x,y where several pads share a name; then routed paths per layer and width w, separated by ;. In a path a pad name is that pad's centre, name@x,y a point inside that pad or via, vN(x,y) a via of type N, cw(c..) or ccw(c..) an arc to the next point about the centre after c; other vN are vias at no path point)
+3V3_ESP: "CAN ESP PWR.3" C4.2 C13.1 C14.1 C24.2 C25.2 D2.A ESP.2 J4.P4 pad.9 Q1.1 R4.2 R7.1 R8.2 R16.2 R17.2 R18.2 R19.2 R20.2 R21.2 U2.2 U2.4 | length 164
  Top Layer w0.4: Q1.1@39.57,69.98 39.63,70.04 42.26,70.04 42.62,70.4 42.62,70.495 43.985,71.86 43.985,74.375 43.76,74.6
  Top Layer w1: pad.9@15.6,97.2 19.72,97.2 ; U2.2@22.4,90.755 v1(22.4,93) 25.8,93 27.25,91.55 D2.A@29.5,91.55 31.075,91.55 v1(34.425,94.9) 34.425,96.148 35.367,97.09 ESP.2@36.975,97.09 39.296,97.09 39.425,97.219 v2(39.498,97.219) ; R16.2@83.95,82.5 R16.2@83.95,82.55 ; v1(86.45,82.55) 86.457,82.557 C24.2@86.457,82.6 ; C25.2@86.457,79.8 C24.2@86.457,82.6 ; v1(92.7,94.4) 85.575,94.4 83.95,92.775 R18.2@83.95,90.925 R19.2@83.95,88.1 R20.2@83.95,85.3 R16.2@83.95,82.55 ; R16.2@83.95,82.55 86.407,82.55 C24.2@86.457,82.6
  Bottom Layer w0.3: R17.2@81.625,76.975 82.775,76.975 86.457,80.657 86.457,82.543 v1(86.45,82.55) 86.457,82.557 86.457,84.043 85.25,85.25 J4.P4@84,85.25
  Bottom Layer w0.4: R7.1@34.225,86.3 34.575,86.3 34.875,86.6 34.875,86.85 36.35,88.325 36.35,89.766 ; C13.1@34.443,97.3 34.434,97.291 34.434,94.909 v1(34.425,94.9) 34.425,91.691 36.35,89.766 ; 43.76,74.6 40.975,77.385 40.975,85.141 36.35,89.766
  Bottom Layer w1: C4.2@22.343,90.8 22.4,90.857 v1(22.4,93) ; v2@39.498,97.159 39.506,97.168 39.623,97.168 39.665,97.125 R8.2@45.39,97.125 ; R8.2@45.8,97.125 R8.2@45.45,97.125 46.02,97.125 47.486,97.125 48.061,96.55 63.175,96.55 65.225,98.6 89.1,98.6 91,96.7 R21.2@91,94.4 v1(92.7,94.4)
+3V3_STM32F4: C2.2 C6.2 C7.2 C8.2 C9.2 C10.2 C11.2 D1.A GPS_L.05 GPS_R.04 IMU.2 pad.6 R10.2 STM.13 STM.19 STM.32 STM.48 STM.64 U1.2 U1.4 | length 211.2
  Top Layer w0.2: STM.13@37.713,47.476 38.654,46.535 38.654,46.096 v1(38.75,46)
  Top Layer w0.25: v1(36.025,41.475) 36.111,41.561 36.111,41.731 STM.19@37.359,42.979 ; STM.64@44.685,51.74 45.325,52.381 45.325,53.5 45.982,54.157 46.644,54.819 C7.2@46.644,55.444
  Top Layer w0.3: v1(38.75,46) 40.523,46 42.7,43.823 ; v1(41.3,34.6) 41.3,37.728 STM.32@41.955,38.383 41.955,38.393 42.7,39.137 42.7,43.823 ; STM.64@44.685,51.74 42.7,49.756 42.7,43.823 ; C10.2@52.875,42.7 52.769,42.594 51.08,42.594 STM.48@49.988,43.686 49.55,44.125 49.55,44.75 48.5,45.8 44.677,45.8 42.7,43.823
  Top Layer w1: v1(41.3,34.6) 40.214,33.514 40.214,30.036 47.35,22.9 v1(53.5,22.9) ; IMU.2@65.795,56.075 73.896,56.075 77.171,59.35 ; GPS_R.04@68.068,13.224 75.124,13.224 84.5,22.6 ; pad.6@77.15,67.75 77.224,67.679 77.271,65.471 ; D1.A@86.9,68.25 80.05,68.25 77.271,65.471 ; GPS_L.05@98.123,15.764 91.336,15.764 84.5,22.6 ; 77.271,65.471 77.271,59.35 77.271,39.529 84.5,32.3 84.5,22.6
  Bottom Layer w0.3: C9.2@36.208,45.588 36.762,45.588 37.174,46 v1(38.75,46) ; v1(41.3,34.6) 41.301,34.599 43.785,34.599 C6.2@43.884,34.5
  Bottom Layer w1: C8.2@35.895,41.605 37.5,43.21 37.5,44.296 C9.2@36.208,45.588 ; C6.2@43.892,34.492 C11.2@45.992,32.392 ; v1(53.5,22.9) R10.2@55.128,24.528 ; R10.2@54.681,24.976 R10.2@54.928,24.728 R10.2@55.128,24.528 ; GPS_R.04@68.068,13.224 66.1,15.192 66.1,20 62.7,23.4 56.257,23.4 55.331,24.325 R10.2@55.128,24.528
+5V_Buck: "ESP PWR.3" "STM PWR.3" C31.1 C32.2 J7.21 J7.22 J7.23 J7.28 J7.29 J7.30 L1.1 R12.2 VR1.3 | length 216.9
  Bottom Layer w1: 27.34,86.9 27.34,86.744 27.053,86.457 27.053,86.253 21.5,80.7 18.8,80.7 9.1,71 9.1,44.17 20.3,32.97 20.3,29.019 21.06,28.259 21.06,25.69 22.75,24 25.5,24 32.235,17.265 32.235,17.025 35.96,13.3 v2(54,13.3) 54,10.5 62.1,2.4 77.2,2.4 80.5,5.7 84.7,5.7 86.4,7.4 86.4,29.63 98.3,41.53 98.3,55.47 96.5,57.27 93.25,57.27 91.46,59.06 91.46,60.5
+5V_ESP: "CAN ESP PWR.1" "ESP PWR.2" C3.2 pad.7 R11.2 U2.3 | length 62.5
  Top Layer w0.5: pad.7@24.3,71.3 26.6,69 26.6,65.575 31.175,61 39.02,61 40.195,62.175 42.05,62.175 42.106,62.231 43.381,62.231 43.825,62.675 43.825,70.025 48.033,74.233 48.182,74.233 48.549,74.6 48.84,74.6
  Top Layer w1: pad.7@24.3,71.3 pad.7@24.456,71.356 ; v1(24.3,79) 24.3,81.5 24.8,82 24.8,86.9 24.7,87 v1(24.7,88.9) 24.7,90.745 U2.3@24.69,90.755
  Bottom Layer w1: pad.7@24.3,71.3 v1(24.3,79) ; v1(24.7,88.9) C3.2@24.7,90.743
+5V_ESP_HDR: "ESP PWR.1" D4.2 J2.1
+5V_Induc: D10.C L1.2 U5.2 | length 18
  Top Layer w1: U5.2@32.5,17.6 35.394,17.6 36.644,18.85 37,18.85 D10.C@37.35,19.2 ; D10.C@37.4,19.2 38.125,18.475 38.125,18.425 40.847,15.703 L1.2@40.847,8.1
+5V_STMF4: "STM PWR.2" C1.2 C22.2 C23.2 J8.3 pad.5 U1.3 | length 59.8
  Top Layer w0.25: J8.3@56.97,64.628 J8.3@56.973,64.63
  Top Layer w0.5: J8.3@56.973,64.63 56.978,64.635 59.066,64.635 59.274,64.428 v1(59.328,64.428)
  Top Layer w1: pad.5@86.9,57.3 92.7,57.3 94,58.6 94,60.5
  Bottom Layer w1: C23.2@54.635,64.146 54.64,64.151 57.537,64.151 57.537,64.318 57.575,64.356 59.256,64.356 v1(59.328,64.428) ; v1@59.328,64.4 59.85,64.4 65.45,70 87.9,70 94,63.9 94,60.5
+5V_STMF4_HDR: "STM PWR.1" D3.2 J.9 J.10 | length 4.4
  Top Layer w0.5: D3.2@89.2,53.4 89.25,53.45 93.47,53.45 J.10@93.56,53.54
+12V: C30.1 C33.2 Q2.3 R14.2 U5.1
Buck_FB: R23.2 U5.4 VR1.1 VR1.2 | length 18.4
  Top Layer w1: VR1.2@23.6,28.2 VR1.1@26.14,28.2 28,28.2 ; R23.2@31,29.15 28.95,29.15 28,28.2 ; U5.4@32.5,21 29.9,21 28,22.9 28,28.2
BuckIn_Diode_PWR_K: D14.A R14.1 | length 2.4
  Top Layer w1: D14.A@36.8,5.15 R14.1@36.8,7.55
BuckOut_Diode_PWR_K: D11.A R12.1 | length 2.1
  Top Layer w0.25: R12.1@58.75,12.8 R12.1@58.76,12.81 ; D11.A@60.81,12.81 D11.A@60.82,12.82
  Top Layer w1: R12.1@58.76,12.81 D11.A@60.81,12.81
CAN_ESP_RS: R3.1 U4.8 | length 4.6
  Top Layer w0.2: U4.8@29.455,65.5 30.73,65.5 32.309,63.921 32.562,63.921 32.96,63.522 R3.1@32.96,63.27
CAN_ESP_Vin: "CAN ESP PWR.2" C20.2 C21.2 U4.3 | length 21.2
  Top Layer w0.5: U4.3@34.795,68.04 36.426,68.04 ; v1(37.2,68.76) 37.146,68.76 36.426,68.04 ; C21.2@38.9,67.05 37.416,67.05 36.426,68.04
  Bottom Layer w0.2: C20.2@35.493,71.41 35.493,69.607 36.34,68.76 v1(37.2,68.76) 40.885,68.76 45.944,73.819 45.944,73.872 46.3,74.228 46.3,74.6
CAN_N: "CAN ESP BUS.2" "CAN STM BUS.2" C27.2 C29.2 D15.2 J7.9 J8.6 U4.6 | length 83.3
  Top Layer w0.2: U4.6@29.455,68.04 29.945,68.04 30.145,67.84 30.145,67.747 30.262,67.63 31.236,67.63 31.254,67.612 31.737,67.612 v1(32.225,68.1)
  Top Layer w0.203: v1(49.5,64.693) 49.971,64.222 50.823,64.222 50.942,64.341 50.942,64.43 51.14,64.628 J8.6@51.63,64.628 51.679,64.579 52.606,64.579 55.476,67.45 56.58,67.45 58.566,69.437 58.566,69.605 58.447,69.724 57.741,69.724 57.525,69.94
  Bottom Layer w0.2: J7.9@19.51,44.751 19.265,44.996 18.247,44.996 18.023,44.772 18.023,43.025 18.002,43.004 18.002,42.734 18.119,42.617 18.688,42.617 D15.2@18.75,42.555 18.812,42.493 18.812,41.486 20.549,41.486 24.5,45.436 24.5,65.3 26.9,67.7 28.211,67.7 29.071,67.7 29.851,68.48 C27.2@30.025,68.48 30.195,68.48 30.95,67.725 31.715,67.725 32.09,68.1 v1(32.225,68.1) 32.342,68.1 32.321,68.079 32.321,67.869 32.575,67.615 32.876,67.615 33.114,67.852 37.901,67.852 ; v1@49.5,64.558 49.703,64.354 49.703,64.337 49.821,64.22 50.493,64.22 51.249,64.22 51.366,64.337 51.366,64.614 51.902,65.15 C29.2@52.025,65.15 ; v1@49.5,64.559 v1(49.5,64.693)
  Bottom Layer w0.203: 37.901,67.852 39.075,66.678 46.188,66.678 46.403,66.893 46.403,67.483 46.665,67.745 46.881,67.529 46.881,66.823 47,66.704 47.358,66.704 48.308,65.754 48.308,64.959 49.045,64.222 49.214,64.222 49.333,64.341 49.333,64.391 v1@49.5,64.559
CAN_P: "CAN ESP BUS.1" "CAN STM BUS.1" C26.2 C28.2 D15.1 J7.17 J8.7 U4.7 | length 86.1
  Top Layer w0.2: U4.7@29.455,66.77 29.945,66.77 30.145,66.97 30.145,67.063 30.262,67.18 31.05,67.18 31.068,67.162 31.738,67.162 32.211,66.689 32.225,66.689 v1(32.225,66.675)
  Top Layer w0.203: v1(49.5,63.293) 49.971,63.764 50.823,63.764 50.942,63.645 50.942,63.556 51.14,63.358 J8.7@51.63,63.358 52.12,63.358 52.318,63.556 52.318,63.645 55.666,66.993 56.769,66.993 59.024,69.247 59.024,69.605 59.143,69.724 59.849,69.724 60.065,69.94
  Bottom Layer w0.2: J7.17@17.01,46.251 17.01,45.847 17.598,45.259 17.598,42.734 17.481,42.617 16.912,42.617 D15.1@16.85,42.555 16.85,42.23 17.045,42.035 17.626,42.035 18.626,41.036 20.736,41.036 24.95,45.25 24.95,65.114 27.086,67.25 28.024,67.25 ; 28.024,67.25 29.059,67.25 29.275,67.034 29.275,66.971 29.902,66.344 29.902,66.33 C26.2@30.025,66.33 30.134,66.33 30.729,66.924 30.729,67.028 30.976,67.275 31.625,67.275 v1(32.225,66.675) 32.225,66.81 32.575,67.161 33.064,67.161 33.302,67.398 37.711,67.398 38.493,66.616 38.493,66.614 ; v1(49.5,63.293) v1@49.5,63.427 ; v1@49.5,63.428 49.703,63.632 49.703,63.649 49.821,63.766 50.305,63.766 51.249,63.766 51.366,63.649 51.366,63.372 51.902,62.836 C28.2@52.025,62.836
  Bottom Layer w0.203: 38.493,66.614 38.886,66.221 45.886,66.221 46.403,65.704 46.403,65.467 46.665,65.205 46.881,65.421 46.881,66.127 47,66.246 47.168,66.246 47.85,65.564 47.85,64.77 48.856,63.764 49.214,63.764 49.333,63.645 49.333,63.595 v1@49.5,63.427
CAN_STMF4_RS: J8.8 R15.1 | length 2.3
  Top Layer w0.2: R15.1@49.701,61.253 50.1,61.651 50.1,61.771 50.417,62.088 J8.8@51.63,62.088
CANRX_ESP: ESP.22 J5.2 | length 16.1
  Top Layer w0.25: J5.2@35.785,74.6 38.56,77.375 46.475,77.375 47.63,78.53 ESP.22@47.63,81.18
CANRX_LOGIC_SH: J5.3 Q1.2 R4.1 | length 5.7
  Top Layer w0.25: J5.3@38.325,74.6 38.325,73.075 39.52,71.88 Q1.2@39.57,71.88 39.69,72 R4.1@41.97,72
CANRX_STMF4: J8.4 STM.61 | length 26.2
  Top Layer w0.25: STM.61@45.745,50.658 55.014,59.927 57.377,59.927 60.7,63.25 60.7,65.275 60.077,65.898 J8.4@56.97,65.898
CANRX_TRANSC: J5.1 Q1.3 R11.1 U4.4 | length 20.6
  Top Layer w0.2: J5.1@33.245,74.6 37.22,71.23 Q1.3@37.57,70.93 ; U4.4@34.795,69.31 35.95,69.31 37.245,70.605 37.245,70.655 Q1.3@37.52,70.93 ; Q1.3@37.62,70.93 37.895,70.655 37.895,69.755 38.875,68.775 42.183,68.775 42.9,68.058 42.9,64.698 42.81,64.608 42.81,64.498 42.411,64.1 R11.1@42.075,64.1
CANTX_ESP: ESP.21 U4.1 | length 29.6
  Top Layer w0.25: U4.1@34.795,65.5 34.305,65.5 33.35,66.455 33.35,70.163 31.475,72.038 31.475,75.375 34.9,78.8 45.25,78.8 46.035,79.585 46.035,80.855 ESP.21@46.36,81.18
CANTX_STMF4: J8.1 STM.62 | length 16.7
  Top Layer w0.25: STM.62@45.392,51.012 47.35,52.97 47.35,53.825 55.613,62.088 J8.1@56.97,62.088
DC_Fuse_+12V: D9.2 F1.2 Q2.2
DC_IN_+12V: F1.1 J7.34 J11.2 | length 32.2
  Top Layer w1.7: F1.1@3.66,17.2 3.66,22.46 6.539,25.339 8.846,25.339 9.1,25.593 9.1,36.2 11.51,38.61 J7.34@11.51,44.751
ESP_46_Pull-up: ESP.16 R7.2 | length 8.3
  Top Layer w0.25: v1(38.65,84.35) 38.65,82.65 39.685,81.615 39.685,81.225 39.73,81.18 ESP.16@40.01,81.18
  Bottom Layer w0.25: R7.2@34.225,84.4 34.275,84.35 v1(38.65,84.35)
ESP_BOOT: "ESP BOOT.3" "ESP BOOT.4" C18.1 ESP.27 | length 35
  Top Layer w0.2: v1(38.575,85.8) 38.671,85.704 38.946,85.704 41.4,83.25 v1(42.1,83.25) ; v1(52.225,82.725) 52.325,82.725 53.2,81.85 ESP.27@54.475,81.85
  Bottom Layer w0.2: 26.95,78.65 26.95,83.15 30.098,83.15 30.734,83.786 C18.1@30.925,83.786 31.075,83.786 32.639,85.35 38.125,85.35 v1(38.575,85.8) ; v1(42.1,83.25) 46.693,83.25 46.968,83.525 51.425,83.525 v1(52.225,82.725)